# EAGLE board adapter (EAGLE 4.13)
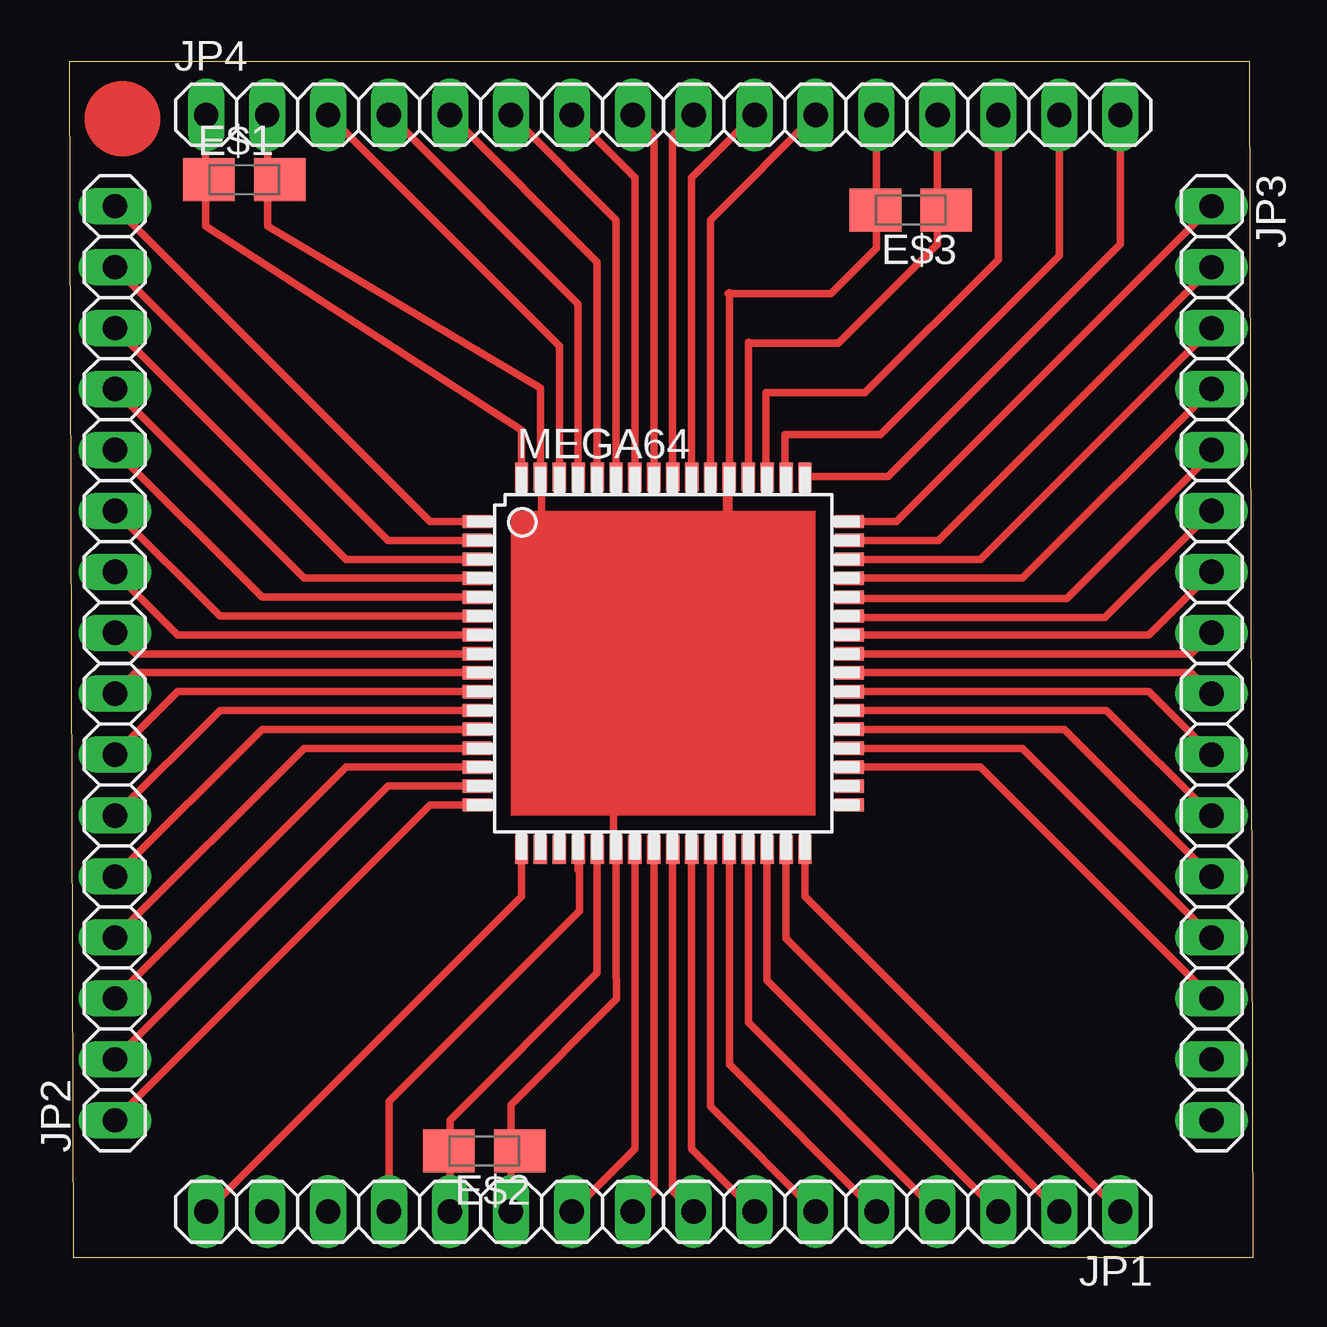
[diagram p0: board, top side]
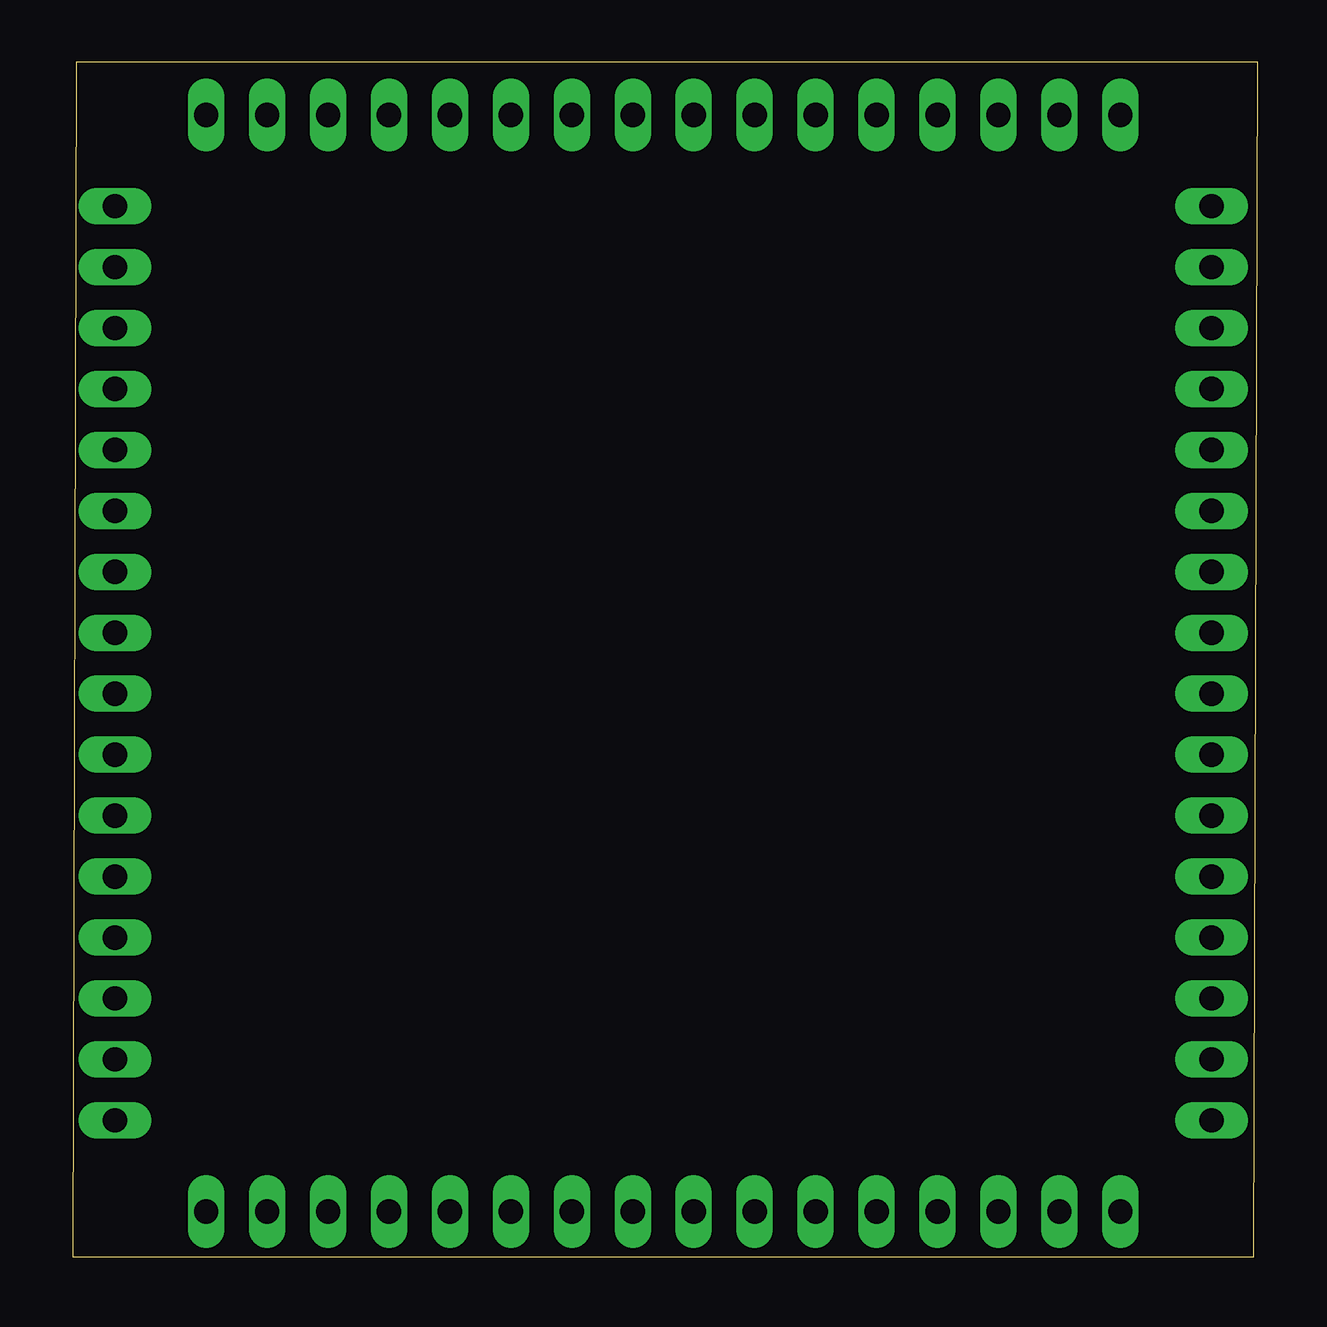
[diagram p1: board, bottom side, seen from below]

Size 49.36 x 49.84 mm. Coordinates in mm from the lower left corner, seen from the top.
Outline: 0.16,0 49.36,0 49.2,49.84 0,49.84 0.16,0
Copper layers (1*16): Top 0.035mm / dielectric 1.5mm / Bottom 0.035mm
Design rules "default": minimum track width 5mil, minimum drill 24mil, track to track 8mil, track to pad 8mil, pad to pad 8mil, via to via 8mil, smd to smd 8mil, copper to edge 8mil, drill to drill 8mil, minimum pad ring 10mil, minimum via ring 8mil, stop-mask expansion 4mil, vias tented up to drill 0mil, thermal gap 10mil

## Footprints (pad centres in the part's own frame; a part is rotated, then mirrored left to right if it is on the bottom)
A/3216-18W = smd 2.15 x 1.8: + 1.475,0; - -1.475,0
1X16 = drill 1.016 long: 1 -19.05,0; 2 -16.51,0; 3 -13.97,0; 4 -11.43,0; 5 -8.89,0; 6 -6.35,0; 7 -3.81,0; 8 -1.27,0; 9 1.27,0; 10 3.81,0; 11 6.35,0; 12 8.89,0; 13 11.43,0; 14 13.97,0; 15 16.51,0; 16 19.05,0
TQFP64 = smd 1.194 x 0.559: 1 -7.76,5.905; 2 -7.76,5.118; 3 -7.76,4.331; 4 -7.76,3.543; 5 -7.76,2.756; 6 -7.76,1.968; 7 -7.76,1.181; 8 -7.76,0.394; 9 -7.76,-0.394; 10 -7.76,-1.181; 11 -7.76,-1.968; 12 -7.76,-2.756; 13 -7.76,-3.543; 14 -7.76,-4.331; 15 -7.76,-5.118; 16 -7.76,-5.905; 33 7.76,-5.905; 34 7.76,-5.118; 35 7.76,-4.331; 36 7.76,-3.543; 37 7.76,-2.756; 38 7.76,-1.968; 39 7.76,-1.181; 40 7.76,-0.394; 41 7.76,0.394; 42 7.76,1.181; 43 7.76,1.968; 44 7.76,2.756; 45 7.76,3.543; 46 7.76,4.331; 47 7.76,5.118; 48 7.76,5.905 | smd 0.559 x 1.194: 17 -5.905,-7.76; 18 -5.118,-7.76; 19 -4.331,-7.76; 20 -3.543,-7.76; 21 -2.756,-7.76; 22 -1.968,-7.76; 23 -1.181,-7.76; 24 -0.394,-7.76; 25 0.394,-7.76; 26 1.181,-7.76; 27 1.968,-7.76; 28 2.756,-7.76; 29 3.543,-7.76; 30 4.331,-7.76; 31 5.118,-7.76; 32 5.905,-7.76; 49 5.905,7.76; 50 5.118,7.76; 51 4.331,7.76; 52 3.543,7.76; 53 2.756,7.76; 54 1.968,7.76; 55 1.181,7.76; 56 0.394,7.76; 57 -0.394,7.76; 58 -1.181,7.76; 59 -1.968,7.76; 60 -2.756,7.76; 61 -3.543,7.76; 62 -4.331,7.76; 63 -5.118,7.76; 64 -5.905,7.76

## Placement (x,y rotation side)
E$1  [A/3216-18W]  7.3,44.92 0 top
E$2  [A/3216-18W]  17.3,4.44 180 top
E$3  [A/3216-18W]  35.08,43.65 180 top
JP1  [1X16]  24.76,1.9 180 top
JP2  [1X16]  1.9,24.76 90 top
JP3  [1X16]  47.62,24.76 270 top
JP4  [1X16]  24.76,47.62 0 top
MEGA64  [TQFP64]  24.76,24.76 0 top

## Library data of the parts
E$1-E$3 = rcl
JP1-JP4 = pinhead
MEGA64 = microchip

## Nets
AVSS: JP1.13
S$2: JP1.12 MEGA64.21
S$3: JP4.2 MEGA64.63
S$4: JP4.4 MEGA64.61
S$5: JP4.5 MEGA64.60
S$6: JP4.6 MEGA64.59
S$7: JP4.7 MEGA64.58
S$8: JP4.8 MEGA64.57
S$9: JP4.9 MEGA64.56
S$10: JP4.10 MEGA64.55
S$11: JP4.11 MEGA64.54
S$12: JP4.3 MEGA64.62
S$13: JP4.12 MEGA64.53
S$15: JP4.15
S$16: JP4.16
S$17: JP3.1 MEGA64.48
S$18: JP3.2 MEGA64.47
S$19: JP3.3 MEGA64.46
S$20: JP3.4 MEGA64.45
S$21: JP3.6
S$22: JP2.12 MEGA64.5
S$23: JP3.7 MEGA64.42
S$24: JP3.8 MEGA64.41
S$25: JP3.9 MEGA64.40
S$26: JP3.10 MEGA64.39
S$27: JP3.11 MEGA64.38
S$28: JP3.12 MEGA64.37
S$29: JP3.13 MEGA64.36
S$31: JP2.13 MEGA64.4
S$32: JP2.16 MEGA64.1
S$33: JP1.1 MEGA64.32
S$34: JP1.2 MEGA64.31
S$35: JP1.3 MEGA64.30
S$36: JP1.4 MEGA64.29
S$37: JP1.5 MEGA64.28
S$38: JP1.7 MEGA64.26
S$39: JP1.6 MEGA64.27
S$40: JP1.9 MEGA64.24
S$41: JP1.8 MEGA64.25
S$42: JP1.10 MEGA64.23
S$43: JP1.11 MEGA64.22
S$44: JP4.13 MEGA64.52
S$45: MEGA64.20
S$46: JP1.16 MEGA64.17
S$47: JP2.1 MEGA64.16
S$48: JP2.2 MEGA64.15
S$49: JP2.3 MEGA64.14
S$50: JP2.4 MEGA64.13
S$51: JP2.5 MEGA64.12
S$52: JP2.6 MEGA64.11
S$53: JP2.7 MEGA64.10
S$54: JP2.8 MEGA64.9
S$55: JP2.9 MEGA64.8
S$56: JP2.10 MEGA64.7
S$57: JP2.11 MEGA64.6
S$58: JP4.14
S$60: JP2.14 MEGA64.3
S$61: JP2.15 MEGA64.2
S$62: JP4.1 MEGA64.64
S$63: JP3.14 MEGA64.35

## Tracks (layer width: path | path; a pad name or v marks a point on that pad's centre or on a via)
AVSS
  Top 0.305: 21.27,16.66 21.27,14.44 13.33,6.5 JP1.13
S$1
  Top 0.305: 33.01,27.46 41.59,27.46 47.62,33.49
  Top 0.406: 47.62,33.49 47.46,33.65 | 47.62,33.49 | 47.62,33.49 47.78,33.65 47.62,33.81
S$2
  Top 0.305: MEGA64.21 22,11.84 15.87,5.71 JP1.12
  Bottom 1.016: 15.71,1.9 JP1.12
S$3
  Top 0.305: JP4.2 8.27,47.62 8.27,42.98 19.64,36.23 MEGA64.63 19.68,32.52
S$4
  Top 0.305: MEGA64.61 21.22,39.73 JP4.4
S$5
  Top 0.305: MEGA64.60 22,41.49 JP4.5
S$6
  Top 0.305: MEGA64.59 22.79,43.24 JP4.6
S$7
  Top 0.305: MEGA64.58 23.58,44.99 JP4.7
S$8
  Top 0.305: MEGA64.57 24.36,46.74 JP4.8
S$9
  Top 0.305: MEGA64.56 25.15,46.74 JP4.9
S$10
  Top 0.305: MEGA64.55 25.94,44.99 JP4.10
S$11
  Top 0.305: MEGA64.54 26.73,43.24 JP4.11
S$12
  Top 0.305: JP4.3 20.43,37.98 MEGA64.62
S$13
  Top 0.305: JP4.12 33.65,42.06 31.74,40.16 27.46,40.16 27.51,40.22 MEGA64.53
S$15
  Top 0.305: 29.84,32.7 29.84,34.29 33.81,34.29 41.27,41.75 JP4.15
S$16
  Top 0.305: 30.79,32.54 34.12,32.54 43.81,42.22 JP4.16
S$17
  Top 0.305: MEGA64.48 34.47,30.67 JP3.1
S$18
  Top 0.305: MEGA64.47 36.23,29.88 JP3.2
S$19
  Top 0.305: MEGA64.46 37.98,29.09 JP3.3
S$20
  Top 0.305: MEGA64.45 39.73,28.3 JP3.4
S$21
  Top 0.305: 32.38,26.66 43.17,26.66 JP3.6
S$22
  Top 0.305: MEGA64.5 8.03,27.52 JP2.12
S$23
  Top 0.305: MEGA64.42 44.99,25.94 JP3.7
S$24
  Top 0.305: MEGA64.41 46.74,25.15 JP3.8
S$25
  Top 0.305: MEGA64.40 46.74,24.37 JP3.9
S$26
  Top 0.305: MEGA64.39 44.99,23.58 JP3.10
S$27
  Top 0.305: MEGA64.38 43.24,22.79 JP3.11
S$28
  Top 0.305: MEGA64.37 41.48,22 JP3.12
S$29
  Top 0.305: MEGA64.36 39.73,21.22 JP3.13
S$30
  Top 0.406: 27.46,30.48 27.46,32.38
S$31
  Top 0.305: MEGA64.4 9.79,28.3 JP2.13
S$32
  Top 0.305: MEGA64.1 15.04,30.67 JP2.16
  Top 1.27: JP2.16 1.92,43.81
S$33
  Top 0.305: MEGA64.32 30.66,15.05 JP1.1
S$34
  Top 0.305: MEGA64.31 29.88,13.29 JP1.2
S$35
  Top 0.305: MEGA64.30 29.09,11.54 JP1.3
S$36
  Top 0.305: MEGA64.29 28.3,9.79 JP1.4
S$37
  Top 0.305: MEGA64.28 27.51,8.03 JP1.5
S$38
  Top 0.305: MEGA64.26 25.94,4.53 JP1.7
S$39
  Top 0.305: MEGA64.27 26.73,6.28 JP1.6
S$40
  Top 0.305: MEGA64.24 24.36,2.78 JP1.9
S$41
  Top 0.305: MEGA64.25 25.15,2.78 JP1.8
S$42
  Top 0.305: MEGA64.23 23.58,4.53 JP1.10
S$43
  Top 0.305: MEGA64.22 22.79,12.45 22.82,10.77 18.41,6.34 JP1.11
S$44
  Top 0.305: JP4.13 36.19,42.22 32.06,38.09 28.35,38.09 28.3,38.15 MEGA64.52
S$45
  Top 0.305: MEGA64.20 21.22,16.14
S$46
  Top 0.305: MEGA64.17 18.85,15.05 JP1.16
S$47
  Top 0.305: MEGA64.16 15.04,18.85 JP2.1
S$48
  Top 0.305: MEGA64.15 13.29,19.64 JP2.2
S$49
  Top 0.305: MEGA64.14 11.54,20.43 JP2.3
S$50
  Top 0.305: MEGA64.13 9.79,21.22 JP2.4
S$51
  Top 0.305: MEGA64.12 8.03,22 JP2.5
S$52
  Top 0.305: MEGA64.11 6.28,22.79 JP2.6
S$53
  Top 0.305: MEGA64.10 4.53,23.58 JP2.7
S$54
  Top 0.305: MEGA64.9 2.77,24.37 JP2.8
S$55
  Top 0.305: MEGA64.8 2.77,25.15 JP2.9
S$56
  Top 0.305: MEGA64.7 4.53,25.94 JP2.10
S$57
  Top 0.305: MEGA64.6 6.28,26.73 JP2.11
S$58
  Top 0.305: 38.73,47.46 JP4.14 | 38.73,47.46 38.89,47.46 | 38.73,47.46 38.73,41.59 33.17,36.03 29.04,36.03 29.04,32.54
S$60
  Top 0.305: MEGA64.3 11.54,29.09 JP2.14
S$61
  Top 0.305: MEGA64.2 13.29,29.88 JP2.15
S$62
  Top 0.305: JP4.1 5.69,47.62 5.69,42.98 18.85,34.48 MEGA64.64
  Top 1.27: JP4.1 5.71,47.6
S$63
  Top 0.305: MEGA64.35 37.98,20.43 JP3.14
S$64
  Top 0.305: 19.68,30.16 19.68,32.38
S$65
  Top 0.305: 22.69,17.3 22.69,18.73
(copper drawn outside any net)
  shapes: Top area x1, Top circle x1